# EAGLE board ratFinkUpright (EAGLE 8.4.1)
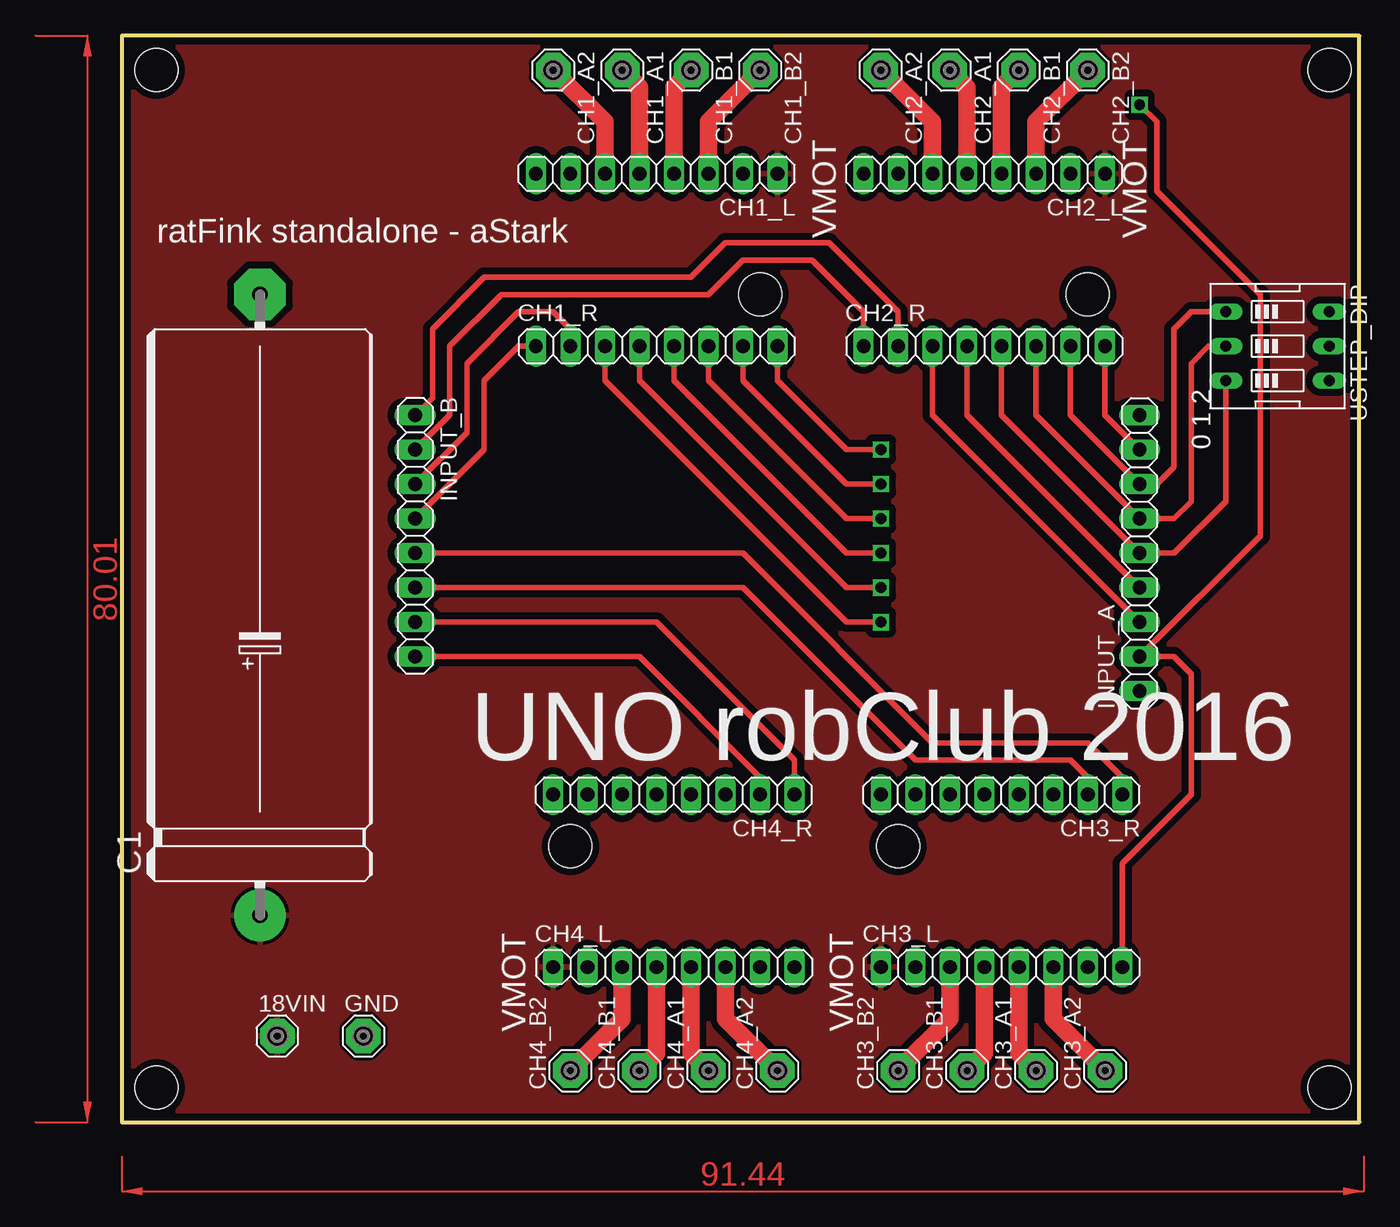
[diagram p0: board, top side]
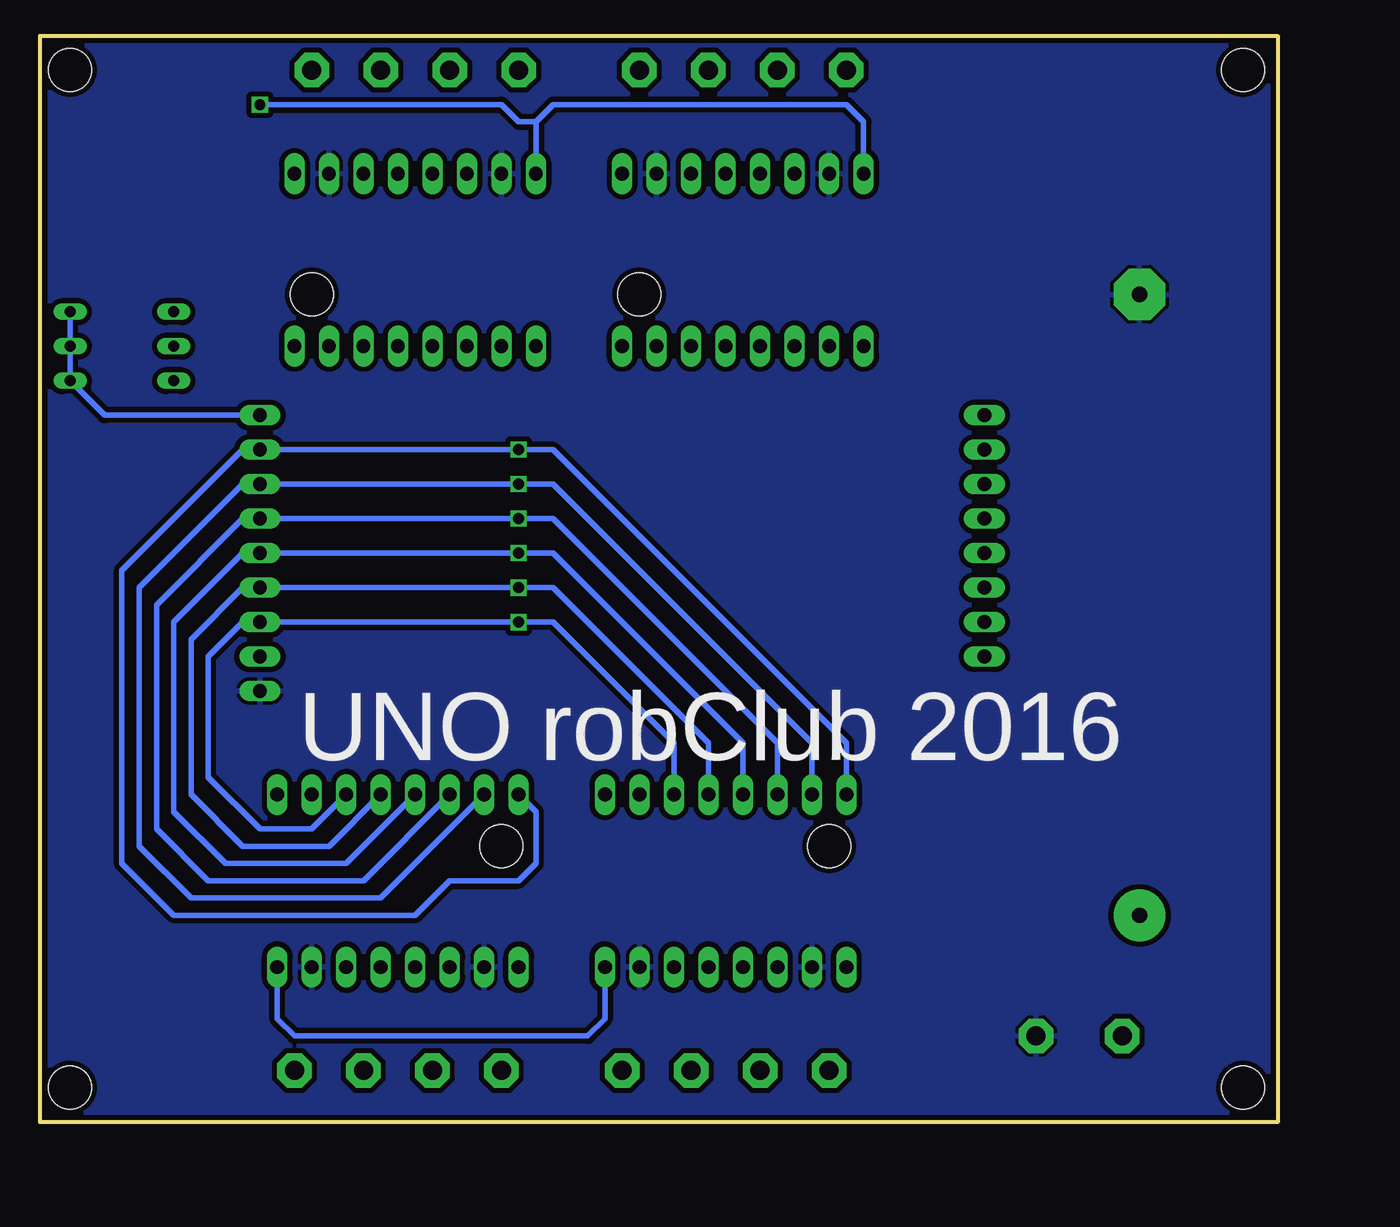
[diagram p1: board, bottom side, seen from below]

Size 91.11 x 80 mm. Coordinates in mm from the lower left corner, seen from the top.
Outline: 0,0 91.11,0 91.11,80 0,80 0,0
Copper layers (1*16): Top 0.0356mm / dielectric 1.5011mm / Bottom 0.0356mm
Design rules "oshpark-2layer *": minimum track width 6mil, minimum drill 13mil, track to track 10mil, track to pad 6mil, pad to pad 6mil, via to via 6mil, smd to smd 6mil, copper to edge 15mil, drill to drill 6mil, minimum pad ring 7mil, minimum via ring 7mil, stop-mask expansion 2.5mil, vias tented up to drill 0mil, thermal gap 10mil
Holes 3.17 mm at 2.54,77.47 88.9,77.47 88.9,2.54 2.54,2.54 46.99,60.96 71.12,60.96 57.15,20.32 33.02,20.32

## Footprints (pad centres in the part's own frame; a part is rotated, then mirrored left to right if it is on the bottom)
SE14 = drill 1.397 pad 2.54 octagon: MP 0,0
E45-16 = drill 1.118 pad 3.81: + -22.86,0 | drill 1.118 pad 3.81 octagon: - 22.86,0
1X08 = drill 1.016 long: 1 -8.89,0; 2 -6.35,0; 3 -3.81,0; 4 -1.27,0; 5 1.27,0; 6 3.81,0; 7 6.35,0; 8 8.89,0
1X09 = drill 1.016 long: 1 -10.16,0; 2 -7.62,0; 3 -5.08,0; 4 -2.54,0; 5 0,0; 6 2.54,0; 7 5.08,0; 8 7.62,0; 9 10.16,0
EDG-03 = drill 0.813 long: 1 -2.54,-3.81; 2 0,-3.81; 3 2.54,-3.81; 4 2.54,3.81; 5 0,3.81; 6 -2.54,3.81

## Placement (x,y rotation side)
18VIN  SE14  [SE14]  11.43,6.35 0 top
C1  100 uF  [E45-16]  10.16,38.1 90 top
CH1_A1  SE14  [SE14]  36.83,77.47 270 top
CH1_A2  SE14  [SE14]  31.75,77.47 270 top
CH1_B1  SE14  [SE14]  41.91,77.47 270 top
CH1_B2  SE14  [SE14]  46.99,77.47 270 top
CH1_L  [1X08]  39.37,69.85 180 top
CH1_R  [1X08]  39.37,57.15 0 top
CH2_A1  SE14  [SE14]  60.96,77.47 270 top
CH2_A2  SE14  [SE14]  55.88,77.47 270 top
CH2_B1  SE14  [SE14]  66.04,77.47 270 top
CH2_B2  SE14  [SE14]  71.12,77.47 270 top
CH2_L  [1X08]  63.5,69.85 180 top
CH2_R  [1X08]  63.5,57.15 0 top
CH3_A1  SE14  [SE14]  67.31,3.81 90 top
CH3_A2  SE14  [SE14]  72.39,3.81 90 top
CH3_B1  SE14  [SE14]  62.23,3.81 90 top
CH3_B2  SE14  [SE14]  57.15,3.81 90 top
CH3_L  [1X08]  64.77,11.43 0 top
CH3_R  [1X08]  64.77,24.13 180 top
CH4_A1  SE14  [SE14]  43.18,3.81 90 top
CH4_A2  SE14  [SE14]  48.26,3.81 90 top
CH4_B1  SE14  [SE14]  38.1,3.81 90 top
CH4_B2  SE14  [SE14]  33.02,3.81 90 top
CH4_L  [1X08]  40.64,11.43 0 top
CH4_R  [1X08]  40.64,24.13 180 top
GND  SE14  [SE14]  17.78,6.35 0 top
INPUT_A  [1X09]  74.93,41.91 90 top
INPUT_B  [1X08]  21.59,43.18 270 top
USTEP_DIP  [EDG-03]  85.09,57.15 270 top

## Library data of the parts
18VIN CH1_A1 CH1_A2 CH1_B1 CH1_B2 CH2_A1 CH2_A2 CH2_B1 CH2_B2 CH3_A1 CH3_A2 CH3_B1 CH3_B2 CH4_A1 CH4_A2 CH4_B1 CH4_B2 GND = solpad
C1 = resistor
CH1_L CH1_R CH2_L CH2_R CH3_L CH3_R CH4_L CH4_R INPUT_A INPUT_B = pinhead
USTEP_DIP = special

## Nets
5VIN: INPUT_A.9 USTEP_DIP.4 USTEP_DIP.5 USTEP_DIP.6
18VIN: 18VIN.MP C1.+ CH1_L.1 CH2_L.1 CH3_L.1 CH4_L.1
CH1_A1: CH1_A1.MP CH1_L.5
CH1_A2: CH1_A2.MP CH1_L.6
CH1_B1: CH1_B1.MP CH1_L.4
CH1_B2: CH1_B2.MP CH1_L.3
CH2_A1: CH2_A1.MP CH2_L.5
CH2_A2: CH2_A2.MP CH2_L.6
CH2_B1: CH2_B1.MP CH2_L.4
CH2_B2: CH2_B2.MP CH2_L.3
CH3_A1: CH3_A1.MP CH3_L.5
CH3_A2: CH3_A2.MP CH3_L.6
CH3_B1: CH3_B1.MP CH3_L.4
CH3_B2: CH3_B2.MP CH3_L.3
CH4_A1: CH4_A1.MP CH4_L.5
CH4_A2: CH4_A2.MP CH4_L.6
CH4_B1: CH4_B1.MP CH4_L.4
CH4_B2: CH4_B2.MP CH4_L.3
EN: CH1_R.8 CH2_R.8 CH3_R.8 CH4_R.8 INPUT_A.8
FLT: CH1_L.8 CH2_L.8 CH3_L.8 CH4_L.8 INPUT_A.2
GND: C1.- CH1_L.2 CH1_L.7 CH2_L.2 CH2_L.7 CH3_L.2 CH3_L.7 CH4_L.2 CH4_L.7 GND.MP INPUT_A.1
M0: CH1_R.7 CH2_R.7 CH3_R.7 CH4_R.7 INPUT_A.7 USTEP_DIP.1
M1: CH1_R.6 CH2_R.6 CH3_R.6 CH4_R.6 INPUT_A.6 USTEP_DIP.2
M2: CH1_R.5 CH2_R.5 CH3_R.5 CH4_R.5 INPUT_A.5 USTEP_DIP.3
N$1: CH2_R.1 INPUT_B.2
N$2: CH1_R.2 INPUT_B.3
N$3: CH1_R.1 INPUT_B.4
N$4: CH2_R.2 INPUT_B.1
N$6: CH4_R.1 INPUT_B.7
N$7: CH4_R.2 INPUT_B.8
N$8: CH3_R.1 INPUT_B.5
N$9: CH3_R.2 INPUT_B.6
RST: CH1_R.4 CH2_R.4 CH3_R.4 CH4_R.4 INPUT_A.4
SLP: CH1_R.3 CH2_R.3 CH3_R.3 CH4_R.3 INPUT_A.3

## Tracks (layer width: path | path; a pad name or v marks a point on that pad's centre or on a via)
5VIN
  Bottom 0.406: INPUT_A.9 86.36,52.07 USTEP_DIP.4 USTEP_DIP.5 USTEP_DIP.6
18VIN
  pour Top (isolate 0.508): 0,80.01 91.44,80.01 91.44,0 0,0
CH1_A1
  Top 1.27: CH1_A1.MP 38.1,76.2 CH1_L.5
CH1_A2
  Top 1.27: CH1_A2.MP 35.56,73.66 CH1_L.6
CH1_B1
  Top 1.27: CH1_B1.MP 40.64,76.2 CH1_L.4
CH1_B2
  Top 1.27: CH1_B2.MP 43.18,73.66 CH1_L.3
CH2_A1
  Top 1.27: CH2_A1.MP 62.23,76.2 CH2_L.5
CH2_A2
  Top 1.27: CH2_A2.MP 59.69,73.66 CH2_L.6
CH2_B1
  Top 1.27: CH2_B1.MP 64.77,76.2 CH2_L.4
CH2_B2
  Top 1.27: CH2_B2.MP 67.31,73.66 CH2_L.3
CH3_A1
  Top 1.27: CH3_A1.MP 66.04,5.08 CH3_L.5
CH3_A2
  Top 1.27: CH3_A2.MP 68.58,7.62 CH3_L.6
CH3_B1
  Top 1.27: CH3_B1.MP 63.5,5.08 CH3_L.4
CH3_B2
  Top 1.27: CH3_B2.MP 60.96,7.62 CH3_L.3
CH4_A1
  Top 1.27: CH4_A1.MP 41.91,5.08 CH4_L.5
CH4_A2
  Top 1.27: CH4_A2.MP 44.45,7.62 CH4_L.6
CH4_B1
  Top 1.27: CH4_B1.MP 39.37,5.08 CH4_L.4
CH4_B2
  Top 1.27: CH4_B2.MP 36.83,7.62 CH4_L.3
EN  (via drill 0.8)
  Top 0.406: CH2_R.8 72.39,52.07 INPUT_A.8 | CH1_R.8 48.26,54.61 53.34,49.53 v55.88,49.53
  Bottom 0.406: CH4_R.8 31.75,27.94 53.34,49.53 v55.88,49.53 INPUT_A.8 76.2,49.53 85.09,40.64 85.09,19.05 81.28,15.24 63.5,15.24 60.96,17.78 55.88,17.78 54.61,19.05 54.61,22.86 CH3_R.8
FLT  (via drill 0.8)
  Top 0.406: CH3_L.8 73.66,19.05 78.74,24.13 78.74,33.02 77.47,34.29 INPUT_A.2 83.82,43.18 83.82,60.96 76.2,68.58 76.2,73.66 v74.93,74.93
  Bottom 0.406: CH1_L.8 30.48,73.66 31.75,74.93 53.34,74.93 54.61,73.66 | 54.61,73.66 CH2_L.8 | CH4_L.8 49.53,7.62 50.8,6.35 72.39,6.35 73.66,7.62 CH3_L.8 | v74.93,74.93 57.15,74.93 55.88,73.66 54.61,73.66
GND
  pour Bottom (isolate 0.381): 0,80.01 91.44,80.01 91.44,0 0,0
M0  (via drill 0.8)
  Top 0.406: CH2_R.7 69.85,52.07 INPUT_A.7 76.2,46.99 77.47,48.26 77.47,58.42 78.74,59.69 USTEP_DIP.1 | CH1_R.7 45.72,54.61 53.34,46.99 v55.88,46.99
  Bottom 0.406: CH4_R.7 34.29,27.94 53.34,46.99 v55.88,46.99 INPUT_A.7 76.2,46.99 83.82,39.37 83.82,20.32 80.01,16.51 66.04,16.51 CH3_R.7
M1  (via drill 0.8)
  Top 0.406: CH2_R.6 67.31,52.07 INPUT_A.6 77.47,44.45 78.74,45.72 78.74,55.88 80.01,57.15 USTEP_DIP.2 | CH1_R.6 43.18,54.61 53.34,44.45 v55.88,44.45
  Bottom 0.406: CH4_R.6 36.83,27.94 53.34,44.45 v55.88,44.45 INPUT_A.6 76.2,44.45 82.55,38.1 82.55,21.59 78.74,17.78 67.31,17.78 CH3_R.6
M2  (via drill 0.8)
  Top 0.406: CH2_R.5 64.77,52.07 INPUT_A.5 77.47,41.91 81.28,45.72 USTEP_DIP.3 | CH1_R.5 40.64,54.61 53.34,41.91 v55.88,41.91
  Bottom 0.406: CH4_R.5 39.37,27.94 53.34,41.91 v55.88,41.91 INPUT_A.5 76.2,41.91 81.28,36.83 81.28,22.86 77.47,19.05 68.58,19.05 CH3_R.5
N$1
  Top 0.406: INPUT_B.2 24.13,52.07 24.13,57.15 27.94,60.96 43.18,60.96 45.72,63.5 50.8,63.5 54.61,59.69 CH2_R.1
N$2
  Top 0.406: INPUT_B.3 25.4,50.8 25.4,55.88 29.21,59.69 31.75,59.69 33.02,58.42 CH1_R.2
N$3
  Top 0.406: CH1_R.1 29.21,57.15 26.67,54.61 26.67,49.53 INPUT_B.4
N$4
  Top 0.406: INPUT_B.1 22.86,53.34 22.86,58.42 26.67,62.23 41.91,62.23 44.45,64.77 52.07,64.77 57.15,59.69 CH2_R.2
N$6
  Top 0.406: INPUT_B.7 39.37,36.83 49.53,26.67 CH4_R.1
N$7
  Top 0.406: INPUT_B.8 38.1,34.29 46.99,25.4 CH4_R.2
N$8
  Top 0.406: INPUT_B.5 45.72,41.91 59.69,27.94 71.12,27.94 73.66,25.4 CH3_R.1
N$9
  Top 0.406: INPUT_B.6 45.72,39.37 58.42,26.67 69.85,26.67 71.12,25.4 CH3_R.2
RST  (via drill 0.8)
  Top 0.406: CH2_R.4 62.23,52.07 INPUT_A.4 | CH1_R.4 38.1,54.61 53.34,39.37 v55.88,39.37
  Bottom 0.406: CH4_R.4 41.91,27.94 53.34,39.37 v55.88,39.37 INPUT_A.4 76.2,39.37 80.01,35.56 80.01,24.13 76.2,20.32 69.85,20.32 CH3_R.4
SLP  (via drill 0.8)
  Top 0.406: CH2_R.3 59.69,52.07 INPUT_A.3 | CH1_R.3 35.56,54.61 53.34,36.83 v55.88,36.83
  Bottom 0.406: CH4_R.3 44.45,27.94 53.34,36.83 v55.88,36.83 INPUT_A.3 76.2,36.83 78.74,34.29 78.74,25.4 74.93,21.59 71.12,21.59 CH3_R.3
(copper drawn outside any net)
  shapes: Top area x2

## Text on the board
tPlace: VMOT | VMOT | VMOT | VMOT
tNames: ratFink standalone - aStark | 0 1 2 | UNO robClub 2016
bNames: UNO robClub 2016